# Altium PCB regulator9V.PcbDoc
Units mm, origin at the board's own origin, x right, y up, seen from the top; angles counter-clockwise.
Board outline 48.77 x 20.07 mm, 2 copper layers (Top Layer, Bottom Layer); 5 components, 3 nets, 16 pads, 0 vias.
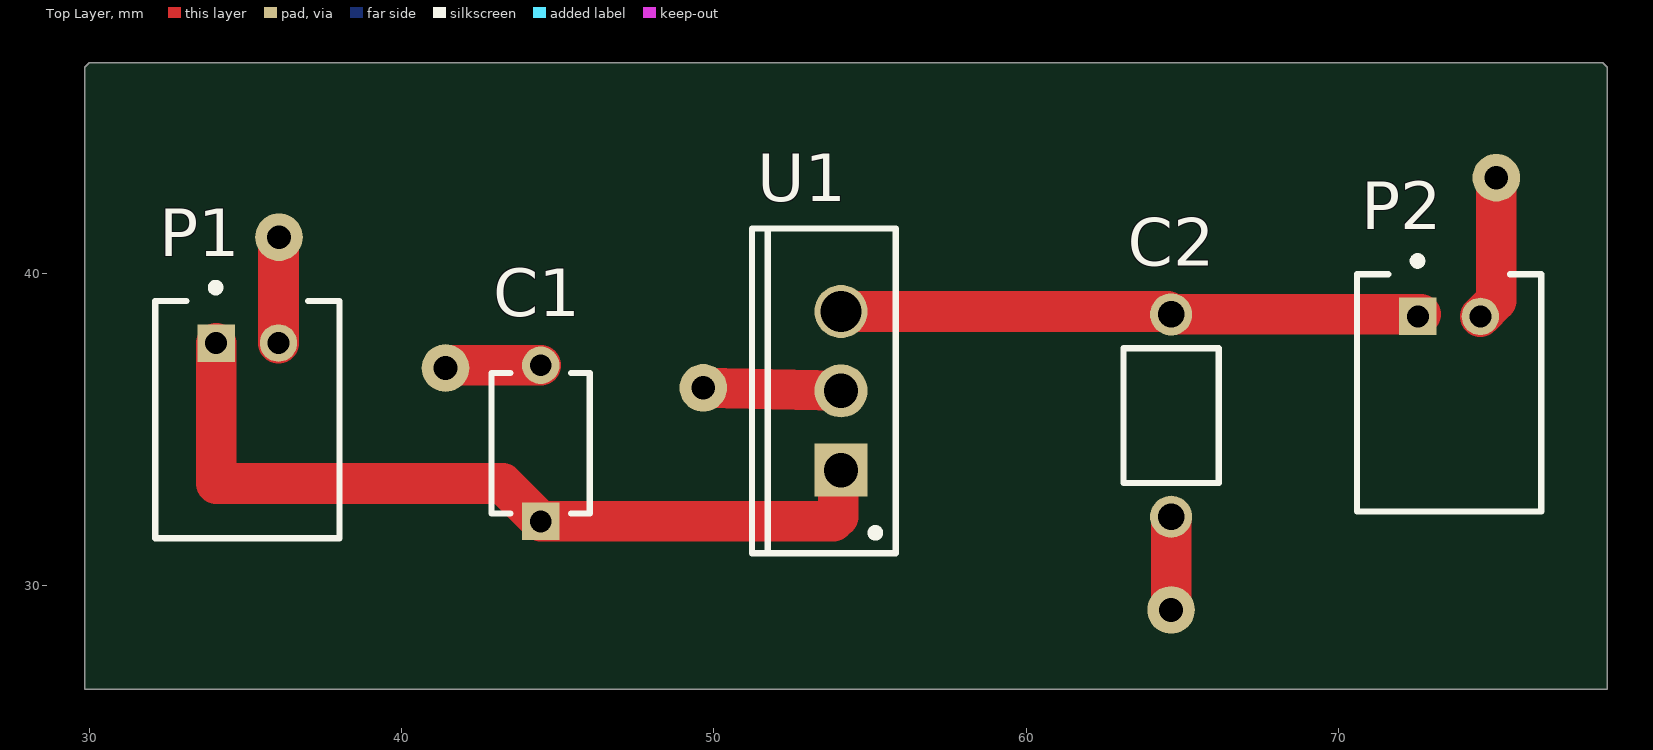
[diagram p0: Top Layer view]
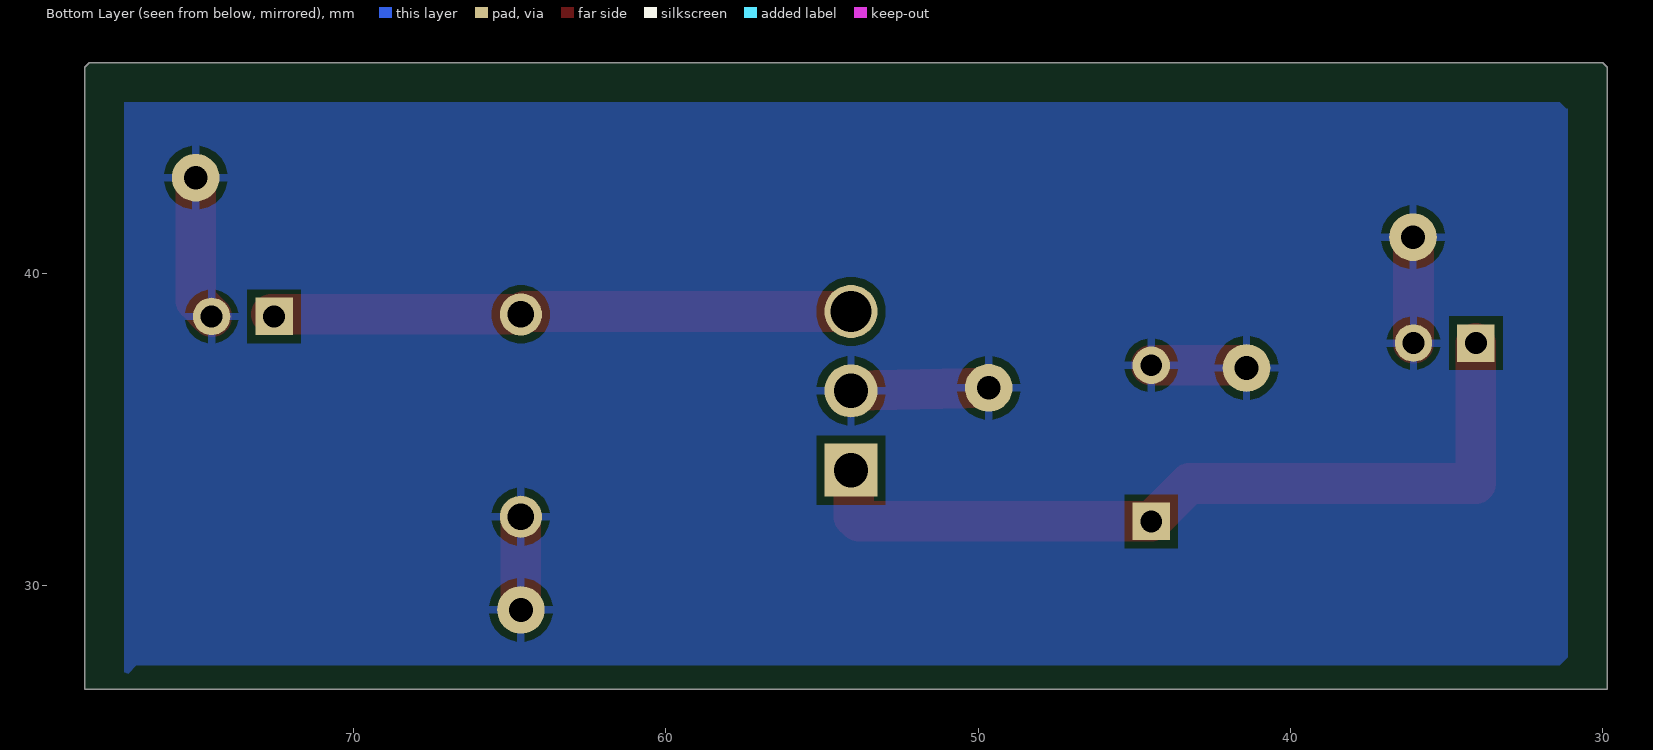
[diagram p1: Bottom Layer view, seen from below]

## Layer stack, top to bottom
Top Solder: solder mask 0.0102, Solder Resist, Dk 3.5
Top Layer: signal copper 0.0356
Dielectric 1: dielectric 0.32, FR-4, Dk 4.8
Bottom Layer: signal copper 0.0356
Bottom Solder: solder mask 0.0102, Solder Resist, Dk 3.5

## Board outline
29.845,45.466 29.845,46.587 29.994,46.736 78.464,46.736 78.613,46.587 78.613,26.67 29.845,26.67

## Design rules (kind name [scope] priority, off if disabled: settings)
Clearance [All] p1: gap=0.254 ignorepadtopadclearanceinfootprint=FALSE
PolygonConnect [All] p1: connectstyle=Relief reliefconductorwidth=0.254 reliefentries=4 polygonreliefangle="90 Angle" airgapwidth=0.254
RoutingVias [All] p1: holewidth=0.711 width=1.27 viastyle="Through Hole" minholewidth=0.711 minwidth=1.27 maxholewidth=0.711 maxwidth=1.27
SolderMaskExpansion [All] p1: expansion=0.102 istentingtop=FALSE
SupplyNets "Schematic Supply Nets_2" [InNet('VCC')] p1: voltage=0.000
SupplyNets "Schematic Supply Nets_1" [InNet('GND')] p2: voltage=0.000
SupplyNets "Schematic Supply Nets" [InNet('+9')] p3: voltage=0.000
Width [All] p1: maxlimit=1.33 minlimit=0.254 preferedwidth=1.3 bottomlayer_maxwidth=0.254 bottomlayer_prefwidth=0.254 minimp=50.000000 maximp=50.000000 favimp=50.000000
30 further rules are at their usual default settings.

## Components (designator, comment, footprint, x,y, rotation, side; value= is the part's Value field where it differs from the comment)
C1 "0.33uF" FP-RDE1K1-MFG 44.45,34.544 r90 top
C2 "0.1uF" AVX-SA115C104KAR 64.643,35.433 r90 top
P1 "Input" JST-S2B-PH-K-S_V 35.052,35.306 r0 top
P2 "Output" JST-S2B-PH-K-S_V 73.549,36.158 r0 top
U1 "L7809CV" TO220 54.07,36.227 r90 top

## Footprints (in the part's own frame and the unit in brackets; to place one, negate y for a bottom-side part, rotate by r counter-clockwise, add the part's x,y. Pads: shape width x height; smd on the part's side, far side on the other; paste and mask are expansions set on the pad)
AVX-SA115C104KAR [mm] "THD, 2-Leads, Dia 3.05mm, Body Length 4.32mm"
  round 1.35 hole 0.85: 1(-3.24,0) 2(3.24,0)
  silkscreen extent -2.16,-1.53 2.16,1.53, body extent -3.53,-1.52 3.53,1.52, height 3.05
FP-RDE1K1-MFG [mm]
  rect 1.2x1.2 hole 0.7 paste-2539.97 mask+0: 1(-2.5,0)
  round 1.2 hole 0.7 paste-2539.97 mask+0: 2(2.5,0)
  silkscreen extent -2.25,-1.58 2.25,1.58, body extent -3.2,-1.68 3.2,1.68, height 0.25
JST-S2B-PH-K-S_V [mm] "THD, 2-Leads, Body 7.6x5.9mm, Pitch 2mm"
  rect 1.2x1.2 hole 0.7: 1(-1,2.45)
  round 1.2 hole 0.7: 2(1,2.45)
  silkscreen extent -2.95,-3.8 2.95,4.35, body extent -2.95,-3.8 2.95,3.8, height 4.8
TO220 [mm] "TO, Thru-Hole, Vertical, Heatsink Mounted; 3 In-Line Leads; Pitch 2.54 mm"
  rect 1.7x1.7 hole 1.1: 1(-2.54,0)
  round 1.7 hole 1.1: 2(0,0)
  round 1.7 hole 1.3: 3(2.54,0)
  silkscreen extent -5.2,-1.75 5.2,2.85, body extent -5.25,-1.8 5.25,2.9, height 19.7

## Part data
C1: library part CMP-06035-014941-1, "Ceramic Capacitor 330nF ±10% 50V X7R Radial", Capacitance=330nF, Case/Package=Radial, Dielectric=X7R, Max Operating Temperature=125°C, Min Operating Temperature=-55°C, Package Quantity=2000, Resistor Type=Ceramic, Tolerance=10%, Voltage Rating=50V, Height=3.5mm, Height - Seated (Max)=0.197inch, Lead Diameter=0.5mm, Lead Free="Lead Free", Lead Pitch=0.197inch, Lead/Base Style=Kinked, Length=0.177inch, Mount="Through Hole", Packaging="Tape and Reel", Termination=Radial, Voltage Rating (DC)=50V, Width=0.124inch
C2: library part CMP-2000-07029-1, "Axial Leads / SpinGuard(R), Ceramic Capacitor, 0.10 uF +/- 10%, 50V, -55 to 125 degC, 2-Pin THD, RoHS, Tape and Reel", Capacitance=0.1µF, Manufacturer=AVX, Operating Temperature=-55°C~125°C, Package / Case=Axial, Package Description="2-Pin Axial Lead, Dia 3.05 mm, Body Length 4.32 mm", Package Reference=SA115C104KAR, Ratings=-, Standard Package=1, Temperature Coefficient=X7R, Tolerance=±10%, Voltage - Rated=50V, Applications=GeneralPurpose, Catalog Drawings=SASeries_4.32x3.05, Category=Capacitors, Datasheet URL=https://datasheet.ciiva.com/27051/1074183-27051369.pdf, Datasheet Version=06/2007, Family=CeramicCapacitors, Features=-, Height - Seated (Max)=-, Lead Spacing=-, Lead Style=-, Manufacturer URL=http://www.avx.com/, Mounting Technology=ThroughHole, Mounting Type=ThroughHole, Online Catalog=SpinGuard®SASeries, Other Names=478-3151-1, Packaging=-, Product Training Modules=ComponentSolutionsforSmartMeterApplications, Series=SpinGuard®SA, Size / Dimension="0.120\"Diax0.170\"L(3.05mmx4.32mm)", Thickness (Max)=-
P1 P2: library part CMP-1755-00004-1, "Male Header, Pitch 2 mm, 1 x 2 Position, Height 4.8 mm, Tail Length 3.4 mm, -25 to 85 degC, RoHS, Bulk", Capacitance="10 uF", Case\Package=Radial, Max Operating Temperature="85 degC", Min Operating Temperature="-40 degC", Package Quantity=200, Tolerance=20%, Voltage Rating="50 V", ComponentLink1Description=Datasheet, ComponentLink1URL=http://www.jst-mfg.com/product/pdf/eng/ePH.pdf, DatasheetVersion=Dec-12, Diameter="5 mm", Height="11 mm", Lead Pitch="2 mm", Length="11 mm", Mount="Through Hole", PackageDescription="Male Header, Pitch 2 mm, 1 x 2 Position, Height 4.8 mm, Tail Length 3.4 mm", PackageReference=S2B-PH-K-S, Packaging=Bulk, Pins=2, Radiation Hardening=No, REACH SVHC="No SVHC", RoHSCompliant=true, Voltage Rating (DC)="50 V"
U1: library part CMP-0244-00459-1, "Positive Voltage Regulator, 9V, 3-Pin TO-220", ComponentLink1Description="Manufacturer URL", ComponentLink1URL=http://www.st.com, ComponentLink2Description=Datasheet, ComponentLink2URL=http://www.st.com/internet/com/TECHNICAL_RESOURCES/TECHNICAL_LITERATURE/DATASHEET/CD00000444.pdf, ComponentLink3Description="Package Specification", ComponentLink3URL=http://www.st.com/internet/com/TECHNICAL_RESOURCES/TECHNICAL_LITERATURE/PACKAGE_INFORMATION/CD00004649.pdf, DatasheetVersion=16/11/2011, PackageDescription="TO, Thru-Hole, Vertical, Heatsink Mounted; 3 In-Line Leads; Pitch 2.54 mm", PackageReference=TO220, PackageVersion=ver3.0

## Free pads (board coordinates)
  round 1.524 hole 0.762: 2(36.068,41.148) 3(49.657,36.322) 4(64.643,29.21) 5(41.402,36.957) 6(75.057,43.053)

## Nets (pads, with @x,y where several pads share a name; then routed paths per layer and width w, separated by ;. In a path a pad name is that pad's centre, name@x,y a point inside that pad or via, vN(x,y) a via of type N, cw(c..) or ccw(c..) an arc to the next point about the centre after c; other vN are vias at no path point)
+9: C2.2 P2.1 U1.3 | length 18.6
  Top Layer w1.3: U1.3 64.535,38.768 64.629,38.673 C2.2 P2.1@72.632,38.673
GND: C1.2 C2.1 P1.2 P2.2 pad.2 pad.3 pad.4 pad.5 pad.6 U1.2 | length 18.5
  Top Layer w1.3: P1.2 36.052,40.878 36.068,40.894 pad.2 ; pad.5 41.489,37.044 C1.2 ; pad.3 U1.2 ; pad.4 C2.1 ; P2.2 75.057,39.116 pad.6
VCC: C1.1 P1.1 U1.1 | length 26.8
  Top Layer w0.254: 34.052,33.258 34.201,33.109 ; 53.826,32.044 53.975,32.193
  Top Layer w1.3: P1.1 34.052,33.258 43.236,33.258 C1.1 53.826,32.044 ; 53.975,32.193 U1.1@53.975,33.782

## Polygon pours and split planes (outlines as drawn)
GND on Bottom Layer "GND_L02_P000" (solid, pour order 0): 31.164,45.261 31.369,45.466 77.343,45.466 77.343,27.051 76.962,27.432 31.369,27.432 31.115,27.686 31.115,45.847